# EAGLE board m-power-v0 (EAGLE 5.07)
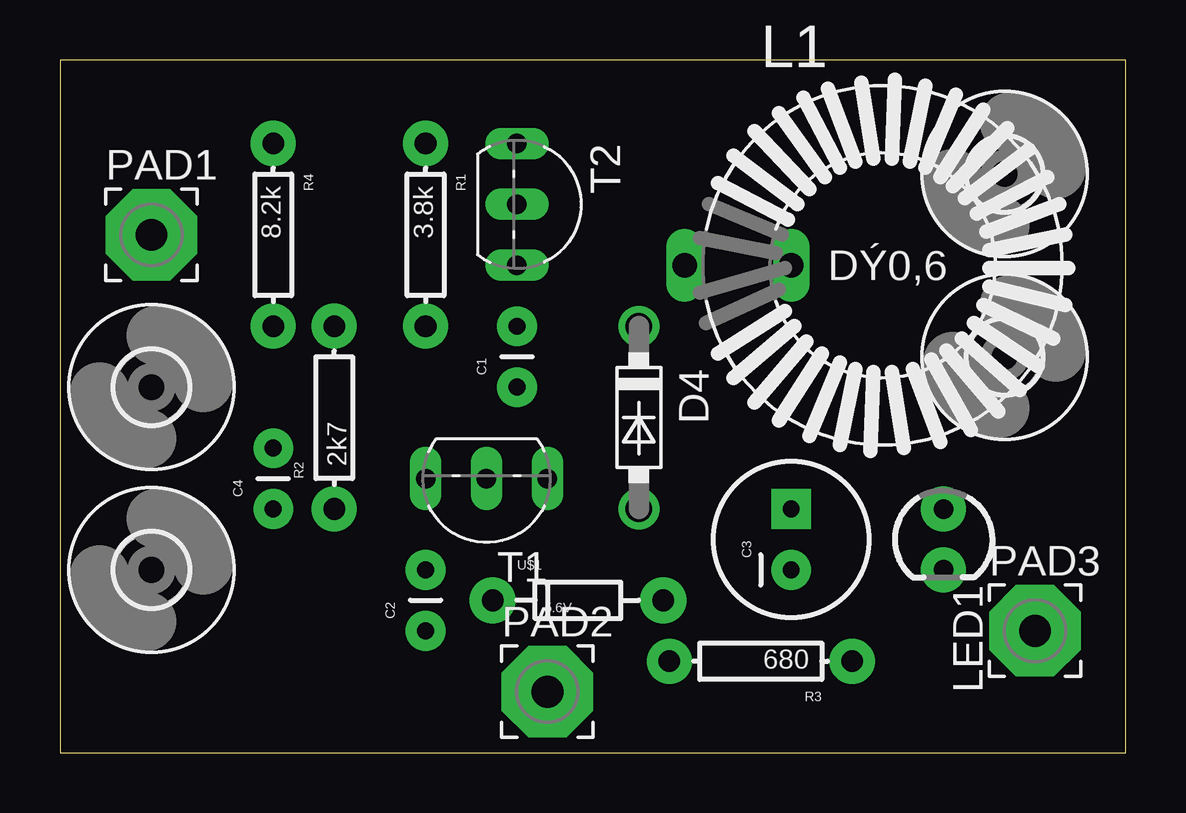
[diagram p0: board, top side]
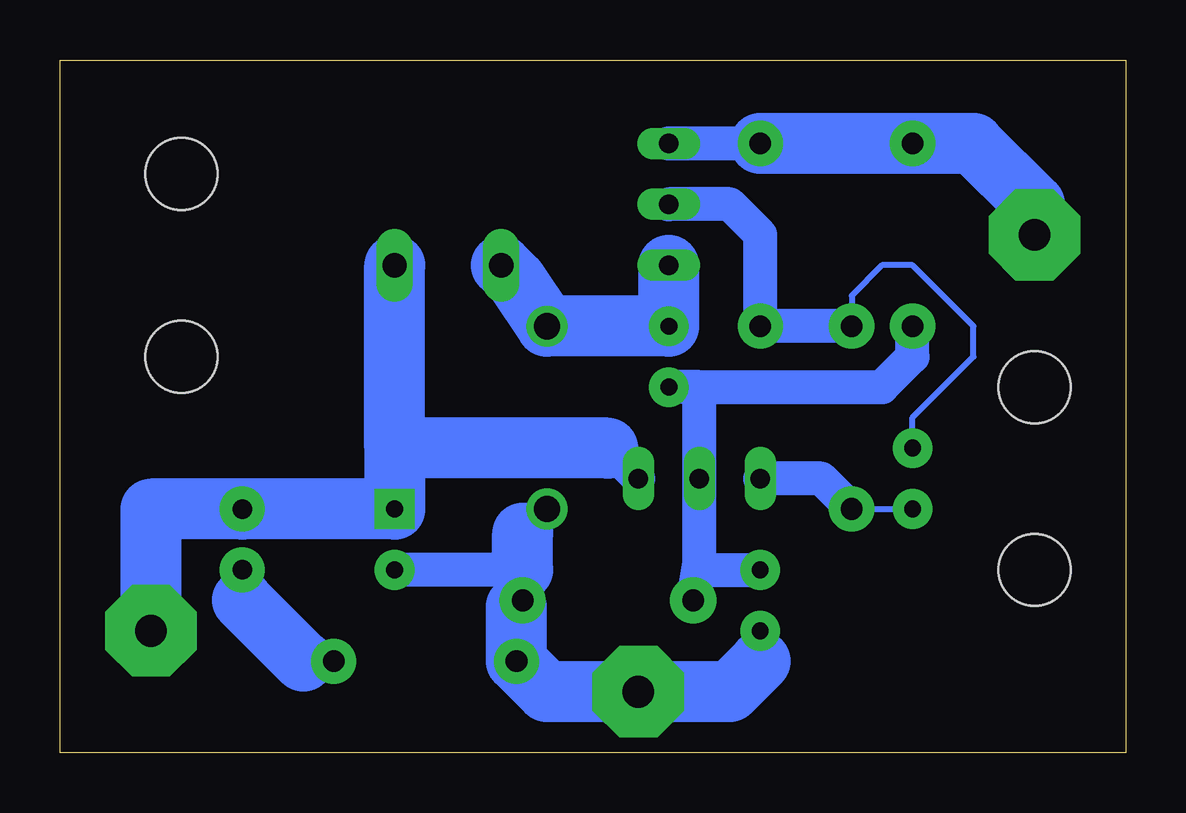
[diagram p1: board, bottom side, seen from below]

Size 44.43 x 28.88 mm. Coordinates in mm from the lower left corner, seen from the top.
Outline: 0,0 44.43,0 44.43,28.88 0,28.88 0,0
Copper layers (1*16): Top 0.035mm / dielectric 1.5mm / Bottom 0.035mm
Design rules "default": minimum track width 10mil, minimum drill 24mil, track to track 8mil, track to pad 8mil, pad to pad 8mil, via to via 8mil, smd to smd 8mil, copper to edge 40mil, drill to drill 8mil, minimum pad ring 10mil, minimum via ring 8mil, stop-mask expansion 4mil, vias tented up to drill 0mil, thermal gap 10mil

## Footprints (pad centres in the part's own frame; a part is rotated, then mirrored left to right if it is on the bottom)
CAP-PTH-SMALL = drill 0.7 pad 1.651 round: 1 0,0; 2 2.54,0
CPOL-RADIAL-100UF-25V = drill 0.7 pad 1.651 square: 1 1.27,0 | drill 0.7 pad 1.651 round: 2 -1.27,0
DO41-7.6 = drill 1.1 pad 1.7 round: A 3.81,0; C -3.81,0
3,0 = hole 3: 0,0
ED16 = drill 1.016 long: 1 -8.255,0; 2 -3.81,0
LED3MM = drill 0.813 pad 1.88 round: A -1.27,0; K 1.27,0
3,81/1,3 = drill 1.321 pad 3.81 octagon: 1 0,0
AXIAL-0.3 = drill 0.9 pad 1.88 round: P$1 -3.81,0; P$2 3.81,0
TO92-EBC = drill 0.813 long: B 0,-1.27; C 2.54,-1.27; E -2.54,-1.27
DIODE-ZENER = drill 0.9 pad 1.93 round: P$1 -3.556,0; P$2 3.556,0
TO92-CLP = drill 0.813 octagon: A 0,1.905; C 1.27,0; R -1.27,0

## Placement (x,y rotation side)
C1  2nF  [CAP-PTH-SMALL]  19.05,15.24 90 top
C2  6.8nf  [CAP-PTH-SMALL]  15.24,5.08 90 top
C3  47uF/16V  [CPOL-RADIAL-100UF-25V]  30.48,8.89 90 top
C4  102  [CAP-PTH-SMALL]  8.89,10.16 90 top
D4  1N5819-B  [DO41-7.6]  24.13,13.97 270 top
H1  MOUNT-HOLE3.0  [3,0]  3.81,15.24 0 top
H2  MOUNT-HOLE3.0  [3,0]  3.81,7.62 0 top
H3  MOUNT-HOLE3.0  [3,0]  39.37,16.51 0 top
H4  MOUNT-HOLE3.0  [3,0]  39.37,24.13 0 top
L1  470uH  [ED16]  34.29,20.32 0 top
LED1  [LED3MM]  36.83,8.89 270 top
PAD1  [3,81/1,3]  3.81,21.59 0 top
PAD2  [3,81/1,3]  20.32,2.54 0 top
PAD3  [3,81/1,3]  40.64,5.08 0 top
R1  3.8k  [AXIAL-0.3]  15.24,21.59 270 top
R2  2k7  [AXIAL-0.3]  11.43,13.97 90 top
R3  680  [AXIAL-0.3]  29.21,3.81 180 top
R4  8.2k  [AXIAL-0.3]  8.89,21.59 270 top
T1  8050  [TO92-EBC]  17.78,10.16 180 top
T2  8550  [TO92-EBC]  20.32,22.86 270 top
U$1  5.6V  [DIODE-ZENER]  21.59,6.35 0 top
VR1  TL431  [TO92-CLP]  -6.35,21.59 90 top  (outside the outline)

## Library data of the parts
C1-C4 L1 LED1 R1-R4 T1 T2 U$1 = digital-toy
D4 = diode
H1-H4 = holes
PAD1-PAD3 = wirepad
VR1 = v-reg

## Nets
GND: C2.1 C3.2 D4.A PAD2.1 R3.P$2 U$1.P$2
N$1: C4.2 R1.P$2 R2.P$2 T2.B
N$2: C4.1 R2.P$1 T1.C
N$3: LED1.K R3.P$1
N$5: C3.1 L1.2 LED1.A PAD3.1 T1.E
N$6: C1.1 C2.2 R4.P$2 T1.B U$1.P$1
N$7: C1.2 D4.C L1.1 T2.C
VCC: PAD1.1 R1.P$1 R4.P$1 T2.E

## Tracks (layer width: path | path; a pad name or v marks a point on that pad's centre or on a via)
GND
  Bottom 1.422: 15.24,3.81 C2.1 | 25.4,6.1 U$1.P$2 25.15,7.62 C3.2 | 25.15,9.14 D4.A
  Bottom 2.54: 15.24,3.81 16.51,2.54 PAD2.1 24.13,2.54 R3.P$2 25.4,6.1 | 25.15,7.62 25.15,9.14
N$1
  Bottom 0.254: C4.2 8.89,13.97 6.35,16.51 6.35,17.78 8.89,20.32 10.16,20.32 11.43,19.05 R2.P$2
  Bottom 1.422: R2.P$2 R1.P$2 15.24,21.59 16.51,22.86 T2.B
N$2
  Bottom 0.254: R2.P$1 C4.1
  Bottom 1.422: T1.C 12.7,11.43 R2.P$1
N$3
  Bottom 1.422: R3.P$1 34.29,3.81 | 36.83,6.35 LED1.K
  Bottom 2.54: 34.29,3.81 36.83,6.35
N$5
  Bottom 1.422: T1.E 21.59,12.7
  Bottom 2.54: 30.48,12.7 C3.1 LED1.A 40.64,10.16 PAD3.1 | 30.48,12.7 L1.2 | 21.59,12.7 30.48,12.7
N$6
  Bottom 1.422: R4.P$2 8.89,16.51 10.16,15.24 17.78,15.24 | 17.78,15.24 C1.1 | 17.78,15.24 T1.B 17.78,7.87 17.82,7.63 | U$1.P$1 17.82,7.63 | C2.2 17.82,7.63
N$7
  Bottom 2.54: L1.1 25.4,19.68 D4.C C1.2 T2.C
VCC
  Bottom 1.422: R1.P$1 T2.E
  Bottom 2.54: PAD1.1 3.81,22.86 6.35,25.4 R4.P$1 R1.P$1